# Altium PCB LED.pcbdoc
Units mm, origin at the board's own origin, x right, y up, seen from the top; angles counter-clockwise.
Board outline 29.1 x 27.99 mm, 2 copper layers (Top Layer, Bottom Layer); 1 components, 0 nets, 2 pads, 0 vias.
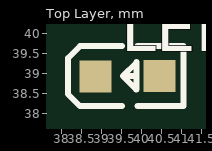
[diagram p0: Top Layer view]
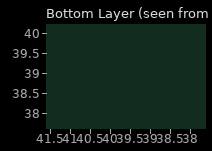
[diagram p1: Bottom Layer view, seen from below]

## Layer stack, top to bottom
Top Layer: signal copper (thickness not stored)
Dielectric: dielectric 0.32, FR-4, Dk 4.8
Bottom Layer: signal copper (thickness not stored)

## Board outline
54.495,25.4 25.4,25.4 25.4,53.392 54.495,53.392

## Components (designator, comment, footprint, x,y, rotation, side; value= is the part's Value field where it differs from the comment)
LED1 "LED0603-RD" LED0603-RD 39.665,38.921 r0 top

## Footprints (in the part's own frame and the unit in brackets; to place one, negate y for a bottom-side part, rotate by r counter-clockwise, add the part's x,y. Pads: shape width x height; smd on the part's side, far side on the other; paste and mask are expansions set on the pad)
LED0603-RD [mm]
  rect 0.8x0.8 smd: 1(-0.799,-0.003) 2(0.799,0.004)
  silkscreen extent -1.49,-0.75 1.39,0.76

## Nets (pads, with @x,y where several pads share a name; then routed paths per layer and width w, separated by ;. In a path a pad name is that pad's centre, name@x,y a point inside that pad or via, vN(x,y) a via of type N, cw(c..) or ccw(c..) an arc to the next point about the centre after c; other vN are vias at no path point)
pads on no net: LED1.1 LED1.2